# Altium PCB A190_24_V3.PcbDoc
Units mm, origin at the board's own origin, x right, y up, seen from the top; angles counter-clockwise.
Board outline 63.93 x 45.04 mm, 2 copper layers (Top Layer, Bottom Layer); 14 components, 16 nets, 47 pads, 8 vias.
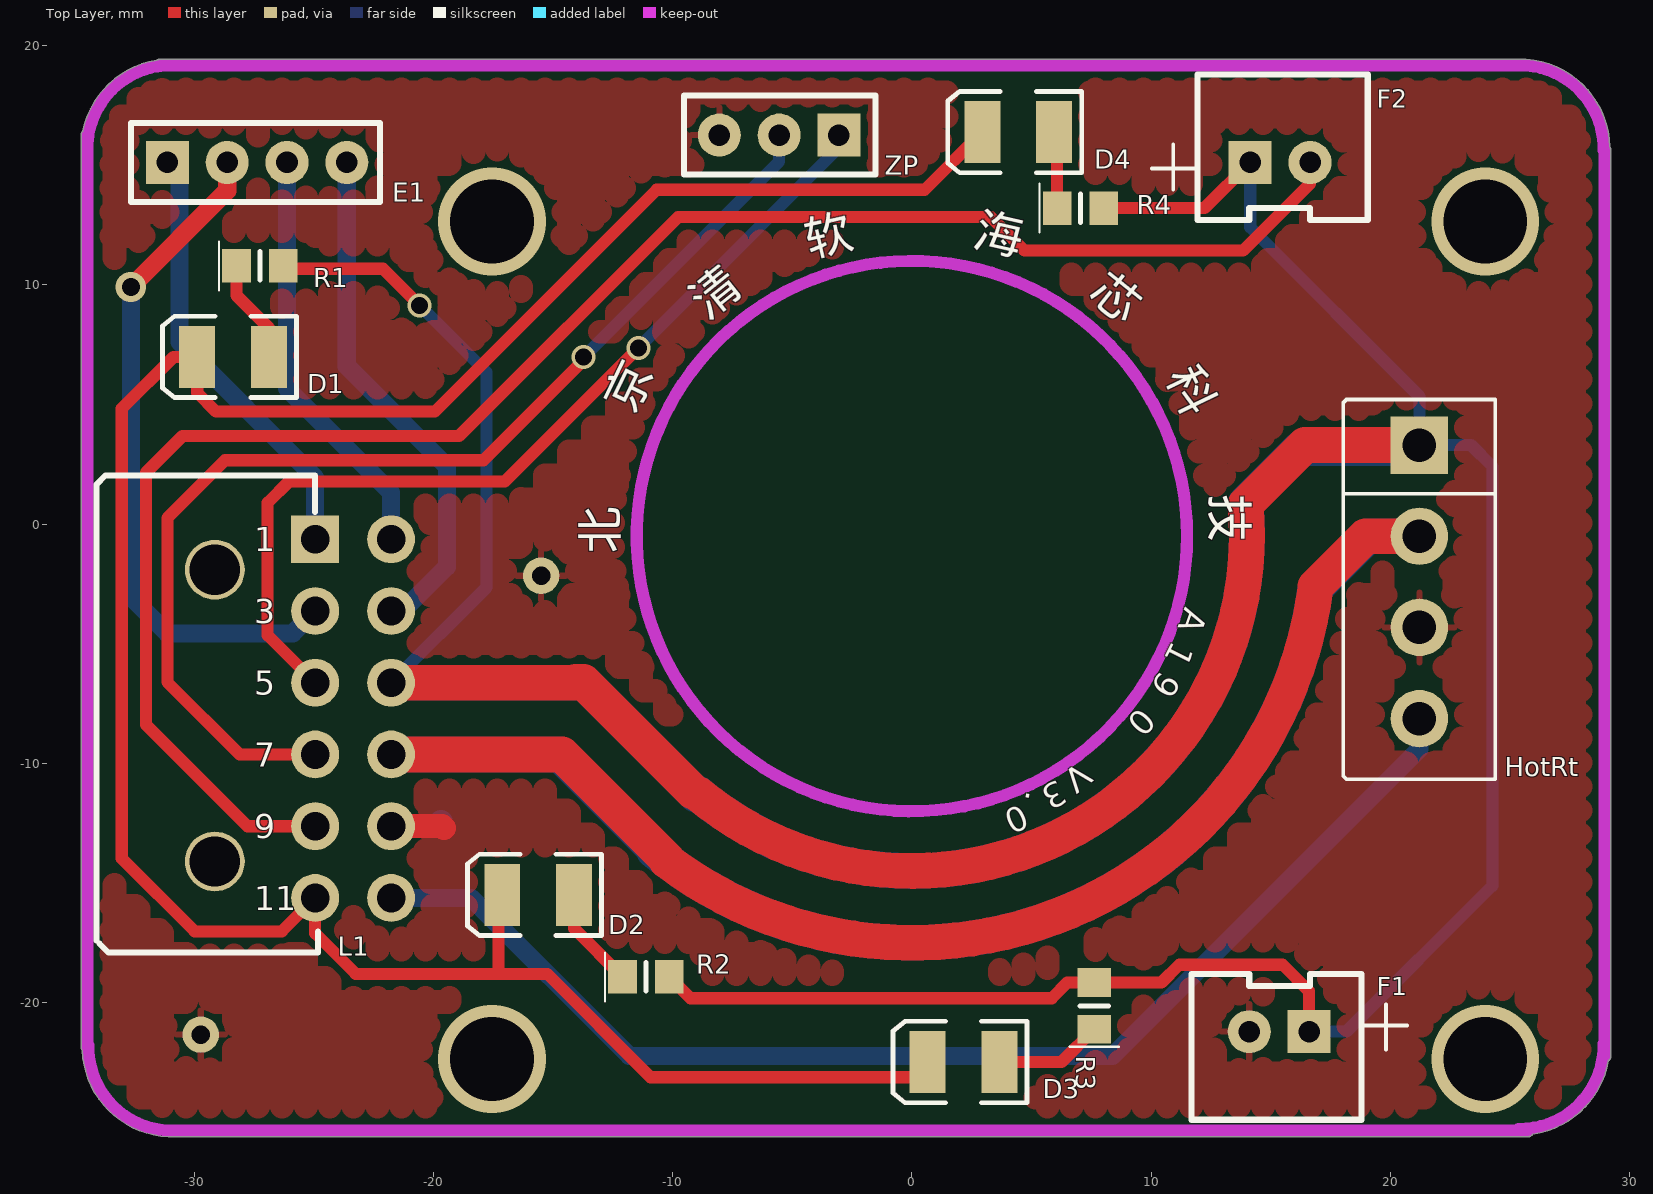
[diagram p0: Top Layer view]
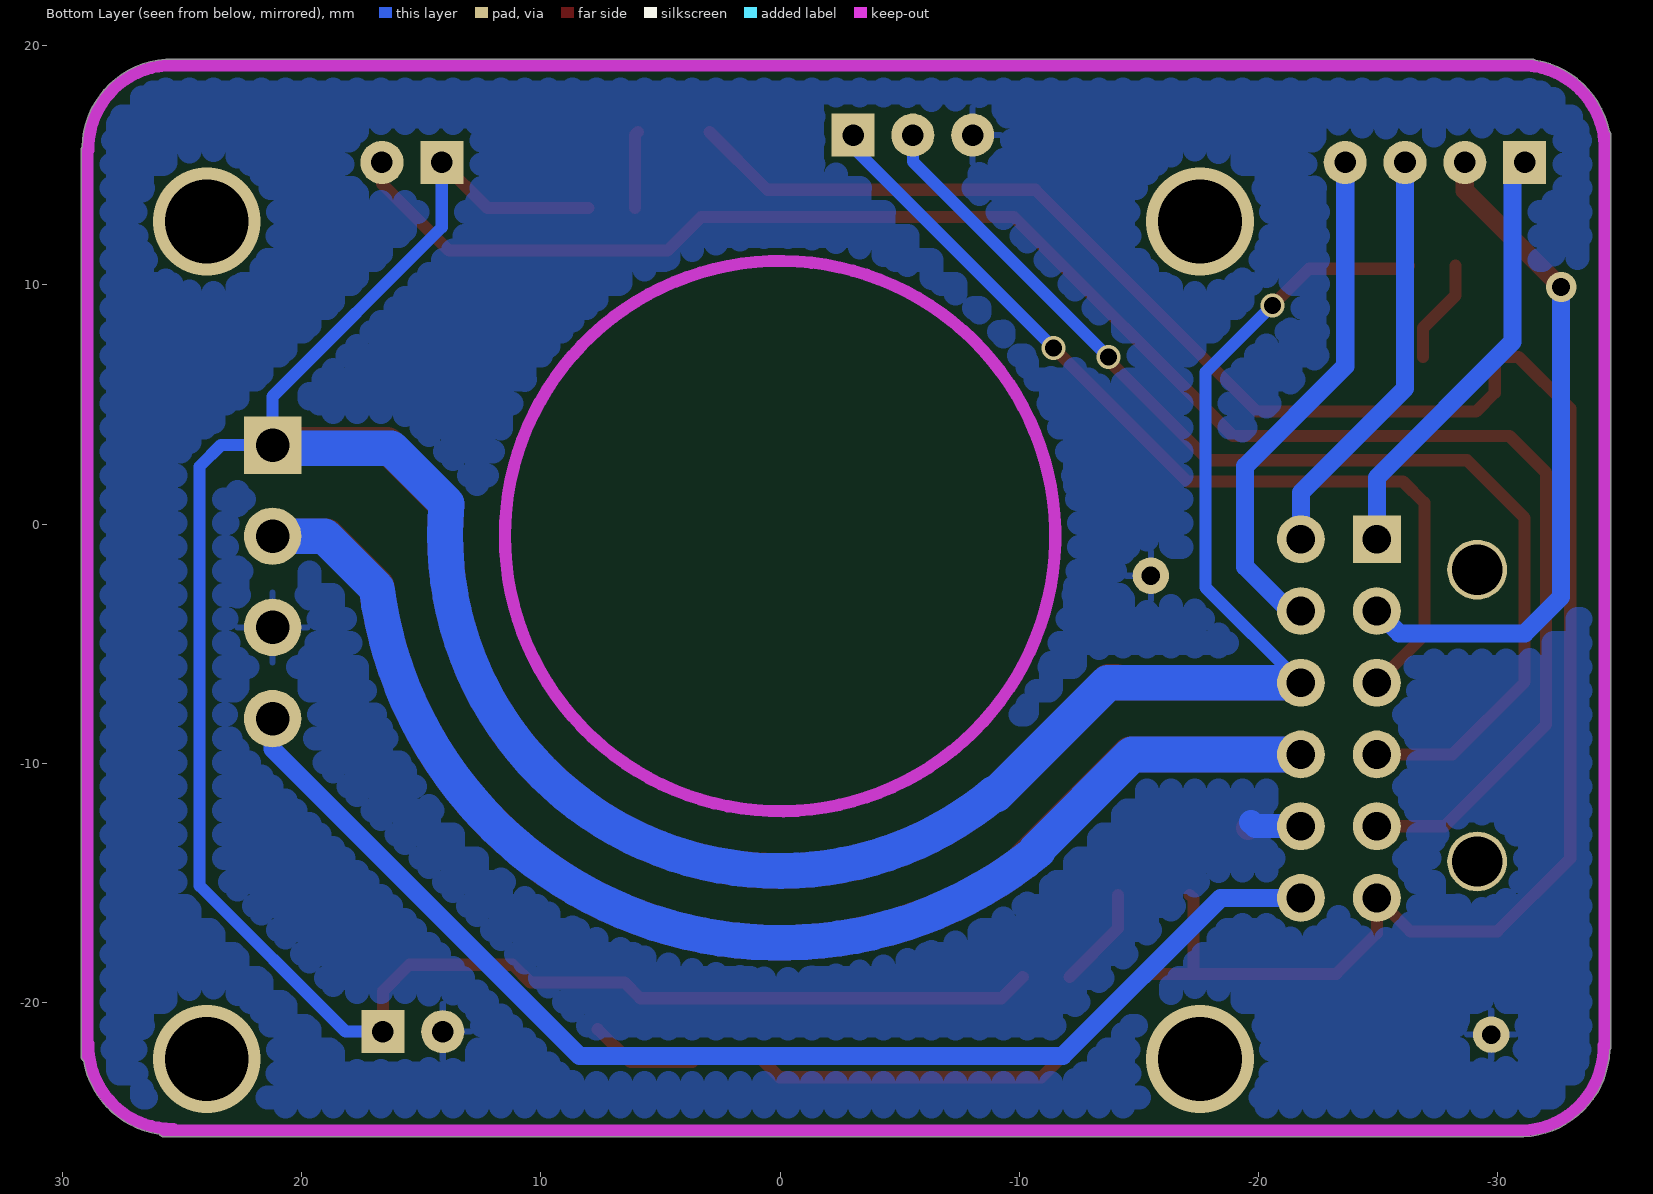
[diagram p1: Bottom Layer view, seen from below]

## Layer stack, top to bottom
Top Solder: solder mask 0.0102, Solder Resist, Dk 3.5
Top Layer: signal copper 0.0356
Dielectric 1: dielectric 0.32, FR-4, Dk 4.8
Bottom Layer: signal copper 0.0356
Bottom Solder: solder mask 0.0102, Solder Resist, Dk 3.5

## Board outline
-34.718,15.616 cw(c-30.972,15.684) -34.718,15.617 cw(c-30.972,15.684) -34.718,15.752 -34.718,16.256 cw(c-34.464,16.256) -34.643,16.437 cw(c-30.972,15.684) -31.562,19.385 cw(c-31.416,19.177) -31.416,19.431 -31.037,19.431 cw(c-30.972,15.684) -30.906,19.431 25.349,19.431 cw(c25.416,15.685) 29.163,15.769 cw(c28.956,15.621) 29.21,15.621 29.21,-22.225 cw(c28.956,-22.225) 29.107,-22.429 cw(c25.417,-21.78) 25.948,-25.49 cw(c25.734,-25.352) 25.734,-25.606 -31.035,-25.606 cw(c-31.035,-25.352) -31.079,-25.602 cw(c-30.908,-21.845) -34.666,-22 cw(c-34.464,-21.845) -34.718,-21.845

## Design rules (kind name [scope] priority, off if disabled: settings)
Clearance [All] p1: gap=0.254
PolygonConnect [All] p1: connectstyle=Relief reliefconductorwidth=0.254 reliefentries=4 polygonreliefangle="90 Angle" airgapwidth=0.254
RoutingVias [All] p1: holewidth=0.711 width=1.27 viastyle="Through Hole" minholewidth=0.711 minwidth=0.5 maxholewidth=0.711 maxwidth=1.27
SolderMaskExpansion [All] p1: expansion=0.102
Width [All] p1: maxlimit=4 minlimit=0.254 preferedwidth=0.254
30 further rules are at their usual default settings.

## Components (designator, comment, footprint, x,y, rotation, side; value= is the part's Value field where it differs from the comment)
D1 "LED3" A190_LED -28.368,6.985 r180 top
D2 "LED3" A190_LED -15.621,-15.494 r180 top
D3 "LED3" A190_LED 2.159,-22.479 r180 top
D4 "LED3" A190_LED 4.445,16.383 r180 top
E1 "P6" P4_254 -31.115,15.113 r0 top
F1 "P2" P2_254 14.097,-21.209 r0 top
F2 "P2" P2_254 16.637,15.113 r180 top
HotRt "P5" 4P_3.81 21.209,3.302 r270 top
L1 "Component_1" A190_12_2 -24.939,-0.635 r0 top
R1 "Res2" 0805 -28.321,10.795 r0 top
R2 "Res2" 0805 -12.192,-18.923 r0 top
R3 "Res2" 0805 7.62,-21.209 r90 top
R4 "Res2" 0805 5.969,13.208 r0 top
ZP "P7" P3_254 -3.048,16.256 r180 top

## Footprints (in the part's own frame and the unit in brackets; to place one, negate y for a bottom-side part, rotate by r counter-clockwise, add the part's x,y. Pads: shape width x height; smd on the part's side, far side on the other; paste and mask are expansions set on the pad)
4P_3.81 [mm]
  rect 2.4x2.4 hole 1.4: 1(0,0)
  round 2.4 hole 1.4: 2(3.81,0) 3(7.62,0) 4(11.43,0)
  silkscreen extent -1.91,-3.18 13.97,3.18
0805 [mm]
  rect 1.2x1.4 smd: 1(0.1,0) 2(2.05,0)
  silkscreen extent -0.64,-1.02 1.07,1.02, body extent 0,-0.7 2.15,0.7, height 0.65
A190_12_2 [mm]
  rect 2x2 hole 1.2: 1(0,0)
  round 2 hole 1.2: 2(3.175,0) 3(0,-2.997) 4(3.175,-2.997) 5(0,-5.994) 6(3.175,-5.994) 7(0,-8.992) 8(3.175,-8.992) 9(0,-11.989) 10(3.175,-11.989) 11(0,-14.986) 12(3.175,-14.986)
  round 2.5 hole 2.1: 13(-4.191,-1.27) 14(-4.191,-13.462)
  silkscreen extent -9.14,-17.27 0.13,2.67
A190_LED [mm]
  rect 1.5x2.6 smd: 1(-1.5,0) 2(1.5,0)
  silkscreen extent -2.65,-1.7 2.95,1.7
P2_254 [mm]
  rect 1.8x1.8 hole 0.9: 1(2.5,0)
  round 1.8 hole 0.9: 2(0,0)
  silkscreen extent -2.41,-3.68 6.6,2.41
P3_254 [mm]
  rect 1.8x1.8 hole 0.9: 1(0,0)
  round 1.8 hole 0.9: 2(2.5,0) 3(5,0)
  silkscreen extent -1.52,-1.65 6.48,1.65
P4_254 [mm]
  rect 1.8x1.8 hole 0.9: 1(0,0)
  round 1.8 hole 0.9: 2(2.5,0) 3(5,0) 4(7.5,0)
  silkscreen extent -1.52,-1.65 8.89,1.65

## Part data
D1 D2 D3 D4: "Typical INFRARED GaAs LED"
E1: library part P4
HotRt: library part CON4
R1 R2 R3 R4: "Resistor"
ZP: library part P3

## Free pads (board coordinates)
  round 1.524 hole 0.762: 0(-29.718,-21.336) 1(-15.494,-2.159)

## Via types
v1: diameter 4.5, hole 3.5, Top Layer to Bottom Layer, 4 vias
v2: diameter 1, hole 0.711, Top Layer to Bottom Layer, 3 vias
v3: diameter 1.27, hole 0.762, Top Layer to Bottom Layer, 1 vias

## Nets (pads, with @x,y where several pads share a name; then routed paths per layer and width w, separated by ;. In a path a pad name is that pad's centre, name@x,y a point inside that pad or via, vN(x,y) a via of type N, cw(c..) or ccw(c..) an arc to the next point about the centre after c; other vN are vias at no path point)
0V: F1.2 HotRt.3 L1.10 pad.0 pad.1 ZP.3 | length 4.4
  Top Layer w1: L1.10 -19.634,-12.624 -19.558,-12.7
  Bottom Layer w1: L1.10 -19.863,-12.624 -19.685,-12.446
5V: L1.5 ZP.1 | length 38.9
  Top Layer w0.508: L1.5 -26.924,-4.644 -26.924,0.889 -26.035,1.778 -17.018,1.778 v2(-11.43,7.366)
  Bottom Layer w0.508: v2(-11.43,7.366) -3.048,15.748 ZP.1
12V: F1.1 F2.1 HotRt.1 L1.6 R1.2 R2.2 R3.2 R4.2 | length 219.4
  Top Layer w0.508: R1.2 -26.144,10.668 -22.098,10.668 v2(-20.574,9.144) ; R2.2 -9.253,-19.812 5.842,-19.812 6.495,-19.159 R3.2 10.432,-19.159 11.176,-18.415 15.494,-18.415 16.597,-19.518 F1.1 ; R4.2 12.232,13.208 F2.1
  Top Layer w1.5: L1.6 -14.072,-6.629 -14.046,-6.604 -13.716,-6.604 -9.144,-11.176 ; -8.909,-11.299 ccw(c0,-0.5) 13.938,0.814 16.426,3.302 HotRt.1
  Bottom Layer w0.508: L1.6 -17.78,-2.645 -17.78,6.35 v2(-20.574,9.144) ; F2.1 14.137,12.406 21.209,5.334 HotRt.1 23.368,3.302 24.257,2.413 24.257,-15.113 18.161,-21.209 F1.1
  Bottom Layer w1: HotRt.1@21.077,3.17 HotRt.1
  Bottom Layer w1.5: L1.6 -13.691,-6.629 -9.017,-11.303 ; -8.995,-11.228 ccw(c0,-0.5) 13.935,0.849 16.256,3.17 HotRt.1@21.077,3.17
D_C: D1.2 D2.2 D3.2 D4.2 L1.11 | length 105.4
  Top Layer w0.508: D2.2 -17.272,-15.645 -17.272,-18.796 ; D3.2 0.024,-23.114 -10.922,-23.114 -15.24,-18.796 -17.272,-18.796 ; D4.2 0.532,13.97 -10.668,13.97 -19.939,4.699 -29.083,4.699 -29.868,5.484 D1.2 -30.861,6.985 -33.02,4.826 -33.02,-13.97 -29.972,-17.018 -26.336,-17.018 L1.11 -24.939,-17.098 -23.241,-18.796 -17.272,-18.796
E_1: E1.1 L1.1 | length 18.3
  Bottom Layer w0.762: E1.1 -30.607,14.605 -30.607,7.62 -24.939,1.952 L1.1
E_2: E1.2 L1.3 | length 28.5
  Top Layer w0.762: v3(-32.639,9.906) -28.615,13.93 E1.2
  Bottom Layer w0.762: v3(-32.639,9.906) -32.639,-3.048 -31.115,-4.572 -25.879,-4.572 L1.3
E_3: E1.3 L1.2 | length 17.6
  Bottom Layer w0.762: E1.3 -26.115,5.668 -21.764,1.317 L1.2
E_4: E1.4 L1.4 | length 21.7
  Bottom Layer w0.762: E1.4 -23.615,6.597 -19.431,2.413 -19.431,-1.778 -21.285,-3.632 L1.4
NetD1_1: D1.1 R1.1 | length 4.4
  Top Layer w0.508: R1.1 -28.221,9.552 -26.868,8.199 D1.1
NetD2_1: D2.1 R2.1 | length 4.3
  Top Layer w0.508: D2.1 -14.121,-16.894 R2.1
NetD3_1: D3.1 R3.1 | length 4.5
  Top Layer w0.508: D3.1 6.25,-22.479 R3.1
NetD4_1: D4.1 R4.1 | length 3.2
  Top Layer w0.508: D4.1 6.069,16.259 R4.1
P2_C: F2.2 L1.9 | length 75
  Top Layer w0.508: L1.9 -27.762,-12.624 -32.004,-8.382 -32.004,2.159 -30.48,3.683 -18.923,3.683 -9.779,12.827 3.302,12.827 4.699,11.43 13.843,11.43 16.637,14.224 F2.2
P3_X: HotRt.4 L1.12 | length 52.3
  Bottom Layer w0.762: L1.12 -18.415,-15.621 -11.811,-22.225 8.382,-22.225 21.209,-9.398 HotRt.4
P5_C: HotRt.2 L1.8 | length 108.6
  Top Layer w1.5: L1.8 -14.63,-9.627 -10.16,-14.097 ; -10.257,-14.057 ccw(c0,-0.5) 16.87,-2.601 18.963,-0.508 HotRt.2
  Bottom Layer w1.27: HotRt.2 HotRt.2@21.463,-0.508
  Bottom Layer w1.5: L1.8 -14.707,-9.627 -10.744,-13.589 ; -10.786,-13.64 ccw(c0,-0.5) 16.86,-2.679 19.031,-0.508 HotRt.2
P7_X: L1.7 ZP.2 | length 47.2
  Top Layer w0.508: L1.7 -28.092,-9.627 -31.115,-6.604 -31.115,0.254 -28.702,2.667 -17.907,2.667 -13.716,6.858 v2(-13.716,6.985)
  Bottom Layer w0.508: v2(-13.716,6.985) -5.548,15.153 ZP.2
pads on no net: L1.13 L1.14
copper on no net:
  other v1: -17.544,-22.352 23.956,-22.352 -17.544,12.648 23.956,12.648

## Polygon pours and split planes (outlines as drawn)
0V on Top Layer "Top Layer-No Net" (hatched 90Degree grid 1 track 1, remove dead copper, pour order 18): -34.718,15.616 cw(c-30.974,15.685) -34.718,15.617 cw(c-30.972,15.684) -34.718,15.752 -34.718,16.256 cw(c-34.464,16.256) -34.643,16.437 cw(c-30.972,15.684) -31.562,19.385 cw(c-31.416,19.177) -31.416,19.431 -31.037,19.431 cw(c-30.972,15.684) -30.906,19.431 25.349,19.431 cw(c25.416,15.685) 29.163,15.769 cw(c28.956,15.621) 29.21,15.621 29.21,-22.225 cw(c28.956,-22.225) 29.107,-22.429 cw(c25.417,-21.78) 25.948,-25.49 cw(c25.734,-25.352) 25.734,-25.606 -31.035,-25.606 cw(c-31.035,-25.352) -31.079,-25.602 cw(c-30.908,-21.845) -34.666,-22 cw(c-34.464,-21.845) -34.718,-21.845
0V on Bottom Layer "Top Layer-No Net1" (hatched 90Degree grid 1 track 1, remove dead copper, pour order 20): -34.718,15.616 cw(c-30.974,15.685) -34.718,15.617 cw(c-30.972,15.684) -34.718,15.752 -34.718,16.256 cw(c-34.464,16.256) -34.643,16.437 cw(c-30.972,15.684) -31.562,19.385 cw(c-31.416,19.177) -31.416,19.431 -31.037,19.431 cw(c-30.972,15.684) -30.906,19.431 25.349,19.431 cw(c25.416,15.685) 29.163,15.769 cw(c28.956,15.621) 29.21,15.621 29.21,-22.225 cw(c28.956,-22.225) 29.107,-22.429 cw(c25.417,-21.78) 25.948,-25.49 cw(c25.734,-25.352) 25.734,-25.606 -31.035,-25.606 cw(c-31.035,-25.352) -31.079,-25.602 cw(c-30.908,-21.845) -34.666,-22 cw(c-34.464,-21.845) -34.718,-21.845

## Keep-outs
Keep-Out Layer:
  circle w0.508: c0,-0.5 r11.5
  lines w0.508: -34.464,-21.845 -34.464,16.256 ; -34.464,15.621 cw(c-30.972,15.684) -30.908,19.177 ; -34.414,-21.782 ccw(c-30.908,-21.845) -30.844,-25.351 ; -31.416,19.177 25.353,19.177 cw(c25.416,15.685) 28.909,15.621 ; -31.035,-25.352 -8.048,-25.352 8.081,-25.352 25.734,-25.352 ; 25.353,-25.273 ccw(c25.417,-21.78) 28.909,-21.717 ; 28.956,-22.225 28.956,15.621

## Silkscreen, mask and mechanical layers (free items; w line width, h text height)
Top Overlay:
  text "海" at 2.413,11.176 h2.54 r347.16
  text "软" at -4.191,10.668 h2.54 r12.87
  text "芯" at 6.985,9.144 h2.54 r321.45
  text "清" at -8.255,8.128 h2.54 r38.58
  text "科" at 10.16,5.969 h2.54 r295.74
  text "京" at -11.176,4.318 h2.54 r64.29
  text "技" at 12.065,1.27 h2.54 r270.03
  text "北" at -11.811,-1.27 h2.54 r90
  text "A" at 11.43,-3.429 h1.02 r250.56
  text "1" at 10.922,-4.826 h1.02 r243.43
  text "9" at 10.414,-6.096 h1.02 r237.53
  text "0" at 9.525,-7.62 h1.02 r228.01
  text "V" at 6.985,-9.906 h1.02 r218.66
  text "3" at 6.096,-10.668 h1.02 r208.61
  text "." at 5.08,-11.303 h1.02 r170.54
  text "0" at 4.572,-11.684 h1.02 r204.44

## Text inside footprints (layer, text, board x,y; h text height)
L1: Top Overlay "1" at -27.479,-1.143 h1; Top Overlay "3" at -27.479,-4.14 h1; Top Overlay "5" at -27.479,-7.137 h1; Top Overlay "7" at -27.479,-10.135 h1; Top Overlay "9" at -27.479,-13.132 h1; Top Overlay "11" at -27.479,-16.129 h1